# Altium PCB tetris.PcbDoc
Units mm, origin at the board's own origin, x right, y up, seen from the top; angles counter-clockwise.
Board outline 46.25 x 84.25 mm, 2 copper layers (Top Layer, Bottom Layer); 14 components, 11 nets, 45 pads, 0 vias.
Unrouted connection lines stored in the file: 8.
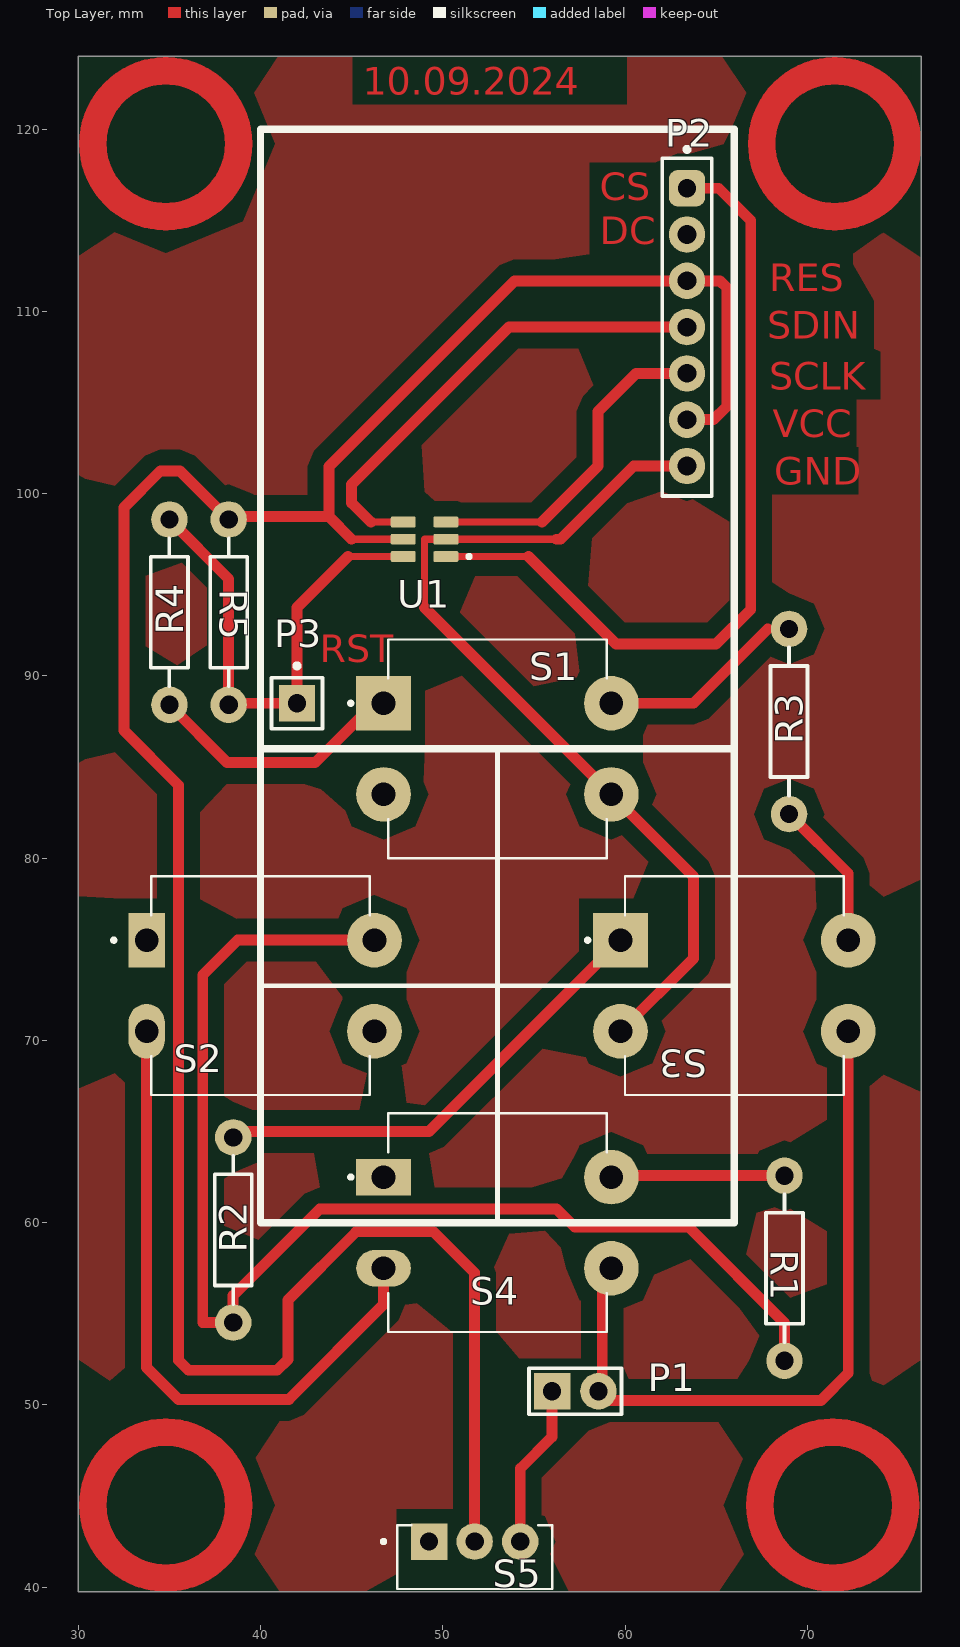
[diagram p0: Top Layer view]
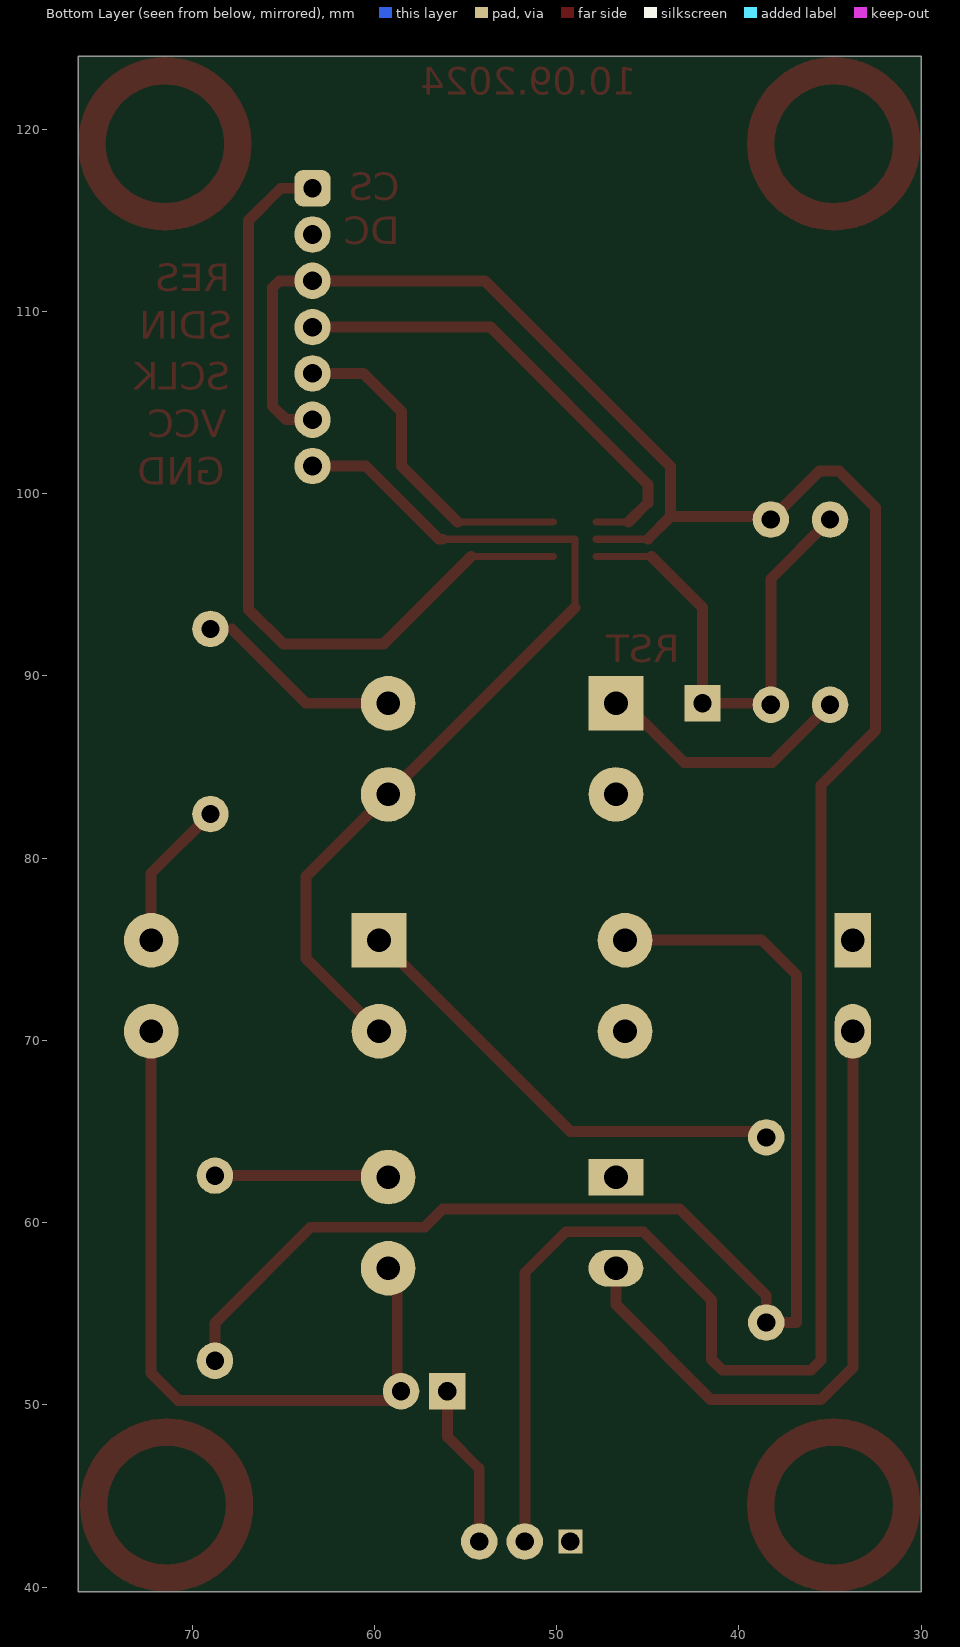
[diagram p1: Bottom Layer view, seen from below]

## Layer stack, top to bottom
Top Solder: solder mask 0.0102, Solder Resist, Dk 3.5
Top Layer: signal copper 0.0356
Dielectric 1: dielectric 0.32, FR-4, Dk 4.8
Bottom Layer: signal copper 0.0356
Bottom Solder: solder mask 0.0102, Solder Resist, Dk 3.5

## Board outline
30,39.75 76.25,39.75 76.25,124 30,124

## Design rules (kind name [scope] priority, off if disabled: settings)
Clearance [All] p1: gap=0.254 ignorepadtopadclearanceinfootprint=FALSE except(0: Arc-Hole Track-Hole SMDPad-Hole THPad-Hole Via-Hole Fill-Hole Poly-Hole Region-Hole Text-Hole; 0.8: Arc-Poly Track-Poly SMDPad-Poly THPad-Poly Via-Poly Fill-Poly Poly-Poly)
PolygonConnect [All] p1: connectstyle=Relief reliefconductorwidth=0.254 reliefentries=4 polygonreliefangle="90 Angle" airgapwidth=0.254
RoutingVias [All] p1: holewidth=0.711 width=1.27 viastyle="Through Hole" minholewidth=0.711 minwidth=1.27 maxholewidth=0.711 maxwidth=1.27
SolderMaskExpansion [All] p1: expansion=0.102
Width [All] p1: maxlimit=0.6 minlimit=0.254 preferedwidth=0.4
30 further rules are at their usual default settings.

## Components (designator, comment, footprint, x,y, rotation, side; value= is the part's Value field where it differs from the comment)
P1 "Power" HDR1X2 56,50.75 r0 top
P2 "LCD_SSD1306" 61300711821 63.4,109.14 r270 top
P3 "Reset" PIN1 42,88.5 r0 top
R1 "1K" AXIAL-0.4 68.75,57.5 r270 top
R2 "1K" AXIAL-0.4 38.5,59.6 r90 top
R3 "1K" AXIAL-0.4 69,87.5 r90 top
R4 "1K" AXIAL-0.4 35,93.5 r90 top
R5 "1K" AXIAL-0.4 38.25,93.5 r90 top
S1 "blue_up" SW_1571627-1#1 53,86 r0 top
S2 "black_left" SW_1571627-1#2 40,73 r0 top
S3 "red_right" SW_1571627-1#1 66,73 r0 top
S4 "white_down" SW_1571627-1#3 53,60 r0 top
S5 "Switch" SW_EG1270 51.75,42.5 r0 top
U1 "ATTINY10-TSHR" SOT95P280X145-6N 49,97.5 r180 top

## Footprints (in the part's own frame and the unit in brackets; to place one, negate y for a bottom-side part, rotate by r counter-clockwise, add the part's x,y. Pads: shape width x height; smd on the part's side, far side on the other; paste and mask are expansions set on the pad)
61300711821 [mm] "Socket Header, Pitch 2.54 mm, THT, Vertical, single row, 7p"
  rrect50% 2x2 hole 1: 1(-7.62,0)
  round 2 hole 1.02: 2(-5.08,0) 3(-2.54,0) 4(0,0) 5(2.54,0) 6(5.08,0) 7(7.62,0)
  silkscreen extent -9.87,-1.35 9.27,1.35, body extent -9.14,-1.25 9.14,1.25, height 8.55
AXIAL-0.4 [mm] "Axial Device, Thru-Hole; 2 Leads; 0.4 in Pin Spacing"
  round 2 hole 1: 1(-5.08,0) 2(5.08,0)
  silkscreen extent -4.06,-1.02 4.06,1.02
HDR1X2 [mm] "Connector; Header; 2 Position"
  rect 2x2 hole 1: 1(0,0)
  round 2 hole 1: 2(2.54,0)
  silkscreen extent -1.27,-1.27 3.81,1.27
PIN1 [mm] "Connector; Plug"
  rect 2x2 hole 1: 1(0,0)
  silkscreen extent -1.4,-1.4 1.4,2.17
SOT95P280X145-6N [mm]
  rrect25% 1.37x0.59 smd: 1(-1.17,0.95) 2(-1.17,0) 3(-1.17,-0.95) 4(1.17,-0.95) 5(1.17,0) 6(1.17,0.95)
  silkscreen extent -2.54,0.85 -2.34,1.05, body extent -1.4,-1.45 1.4,1.45, height 1.45
SW_1571627-1#1 [mm]
  rect 3x3 hole 1.3: 1(-6.25,2.5)
  round 3 hole 1.3: 2(6.25,2.5) 3(-6.25,-2.5) 4(6.25,-2.5)
  silkscreen extent -8.15,-6 6,6
SW_1571627-1#2 [mm]
  rect 2x3 hole 1.3: 1(-6.25,2.5)
  round 3 hole 1.3: 2(6.25,2.5) 4(6.25,-2.5)
  oval 2x3 hole 1.3: 3(-6.25,-2.5)
  silkscreen extent -8.15,-6 6,6
SW_1571627-1#3 [mm]
  rect 3x2 hole 1.3: 1(-6.25,2.5)
  round 3 hole 1.3: 2(6.25,2.5) 4(6.25,-2.5)
  oval 3x2 hole 1.3: 3(-6.25,-2.5)
  silkscreen extent -8.15,-6 6,6
SW_EG1270 [mm]
  rect 2x2 / inner round 1.308 / far side rect 1.308x1.308 hole 1: 1(-2.5,0)
  round 2 hole 1: 2(0,0) 3(2.5,0)
  silkscreen extent -5.1,-2.6 4.25,0.9, body extent -4.25,-4.6 4.25,0.9, height 5.1

## Part data
P1: library part "Header 2", "Header, 2-Pin", LatestRevisionDate=17-Jul-2002, LatestRevisionNote="Re-released for DXP Platform.", Publisher="Altium Limited"
P2: library part 61300711821, "WR-PHD Socket Header, THT, Vertical, pitch 2.54mm, 1 Row, 7P", Contact Resistance=20mOhm, Manufacturer="Wurth Elektronik", Operating Temperature Max=125°C, Operating Temperature Min=-40°C, Rated Current=3A, Withstanding Voltage=500V, Working Voltage=250V, Category="Board-to-Board Connectors", ComponentLink1Description="Website Link", ComponentLink1URL=https://www.we-online.com/redexpert/article/61300711821?ad, ComponentLink2Description="Datasheet Link", ComponentLink2URL=https://www.we-online.com/redexpert/spec/61300711821?ad, Gender="Socket Header", Manufacturer Part Number=61300711821, Match Code=WR-PHD, Mount="Through Hole", Number of Pins=7, Number of Rows=1, Orientation=Vertical, Packaging=Tray, Pitch=2.54mm
P3: library part Plug, "Plug", LatestRevisionDate=17-Jul-2002, LatestRevisionNote="Re-released for DXP Platform.", Publisher="Altium Limited"
R1 R2 R3 R4 R5: library part Res2, "Resistor", LatestRevisionDate=17-Jul-2002, LatestRevisionNote="Re-released for DXP Platform.", PackageDescription="Axial Device, Thru-Hole; 2 Leads; 0.4 in Pin Spacing", PackageReference=AXIAL-0.4, Published=8-Jun-2000, Publisher="Altium Limited"
S1 S2 S3 S4: library part FSM103A, "Switch Tactile OFF (ON) SPST Extended Square Button PC Pins 0.05A 12VDC 2.55N Thru-Hole Loose Piece", Package=None, Availability="In Stock", Check_prices=https://www.snapeda.com/parts/FSM103A/TE%20Connectivity%20ALCOSWITCH%20Switches/view-part/577644/?ref=eda, MF="TE Connectivity", MP=FSM103A, Price=None, Purchase-URL=https://pricing.snapeda.com/search/part/FSM103A/?ref=eda, SnapEDA_Link=https://www.snapeda.com/parts/FSM103A/TE%20Connectivity%20ALCOSWITCH%20Switches/view-part/577644/?ref=snap
S5: library part EG1270, "Slide Switch SPDT Through Hole, Right Angle", Package=None, Availability="In Stock", Check_prices=https://www.snapeda.com/parts/EG1270/E-Switch/view-part/?ref=eda, MF=E-Switch, MP=EG1270, Price=None, Purchase-URL=https://pricing.snapeda.com/search/part/EG1270/?ref=eda, SnapEDA_Link=https://www.snapeda.com/parts/EG1270/E-Switch/view-part/?ref=snap
U1: "AVR AVR® ATtiny Microcontroller IC 8-Bit 12MHz 1KB (512 x 16) FLASH SOT-23-6", Package="SOT-23-6 Microchip", Check_prices=https://www.snapeda.com/parts/ATTINY10-TSHR/Microchip/view-part/?ref=eda, MF=Microchip, MP=ATTINY10-TSHR, SnapEDA_Link=https://www.snapeda.com/parts/ATTINY10-TSHR/Microchip/view-part/?ref=snap

## Nets (pads, with @x,y where several pads share a name; then routed paths per layer and width w, separated by ;. In a path a pad name is that pad's centre, name@x,y a point inside that pad or via, vN(x,y) a via of type N, cw(c..) or ccw(c..) an arc to the next point about the centre after c; other vN are vias at no path point)
BTN_ADC: P3.1 R4.2 R5.1 U1.6 | length 27.5
  Top Layer w0.4: R5.1 R5.1@38.33,88.5 ; 44.8,96.55 U1.6
  Top Layer w0.6: R4.2 38.25,95.33 R5.1 ; R5.1@38.33,88.5 P3.1 42,93.75 44.8,96.55
GND: P1.2 P2.7 S1.3 S1.4 S2.3 S2.4 S3.3 S3.4 S4.3 S4.4 U1.2 | length 127.5
  Top Layer w0.4: 49,93.75 49,97.5 U1.2 56.25,97.5 ; P1.2 P1.2@58.75,50.96
  Top Layer w0.6: S2.3 33.75,52.05 35.5,50.3 41.55,50.3 46.75,55.5 S4.3 ; 49,93.75 S1.4 63.75,79 63.75,74.5 S3.3 ; 56.25,97.5 56.458,97.5 60.478,101.52 P2.7 ; P1.2 59.04,50.25 70.75,50.25 72.25,51.75 S3.4 ; P1.2@58.75,50.96 58.75,57 S4.4
LCD_CS: P2.1 U1.1 | length 45.1
  Top Layer w0.4: U1.1 54.7,96.55
  Top Layer w0.6: 54.7,96.55 59.5,91.75 65,91.75 66.9,93.65 66.9,115 65.14,116.76 P2.1
LCD_SCLK: P2.5 U1.3 | length 18.4
  Top Layer w0.4: U1.3 55.45,98.45
  Top Layer w0.6: 55.45,98.45 58.51,101.51 58.51,104.51 60.6,106.6 P2.5
LCD_SDIN: P2.4 U1.4 | length 26.2
  Top Layer w0.4: 46.05,98.45 U1.4
  Top Layer w0.6: 46.05,98.45 45,99.5 45,100.5 53.64,109.14 P2.4
NetP1_1: P1.1 S5.3 | length 9
  Top Layer w0.6: S5.3 54.25,46.5 56,48.25 P1.1
NetR1_1: R1.1 S4.1 S4.2 | length 9.7
  Top Layer w0.4: S4.1@46.58,62.5 S4.1 ; S4.2 S4.2@59.33,62.58
  Top Layer w0.6: S4.2@59.33,62.58 R1.1
NetR1_2: R1.2 R2.1 S2.1 S2.2 | length 69.3
  Top Layer w0.6: S2.2 38.75,75.5 36.83,73.58 36.83,54.52 R2.1 38.5,56 43.25,60.75 56.25,60.75 57.25,59.75 63.5,59.75 68.75,54.5 R1.2
NetR2_2: R2.2 R3.1 S3.1 S3.2 | length 34.6
  Top Layer w0.6: R2.2 38.5,64.25 39.25,65 49.25,65 S3.1 ; R3.1 72.25,79.17 S3.2
NetR3_2: R3.2 R4.1 S1.1 S1.2 | length 26.1
  Top Layer w0.4: S1.1@46.25,88.5 S1.1 ; S1.2 S1.2@59.25,88.75 ; 67.83,92.58 R3.2
  Top Layer w0.6: R4.1 38.17,85.25 43,85.25 S1.1@46.25,88.5 ; S1.2 63.75,88.5 67.83,92.58
VCC: P2.3 P2.6 R5.2 S5.2 U1.5 | length 141.1
  Top Layer w0.4: R5.2 R5.2@38.42,98.75 ; 45,97.5 U1.5
  Top Layer w0.6: R5.2 35.58,101.25 34.5,101.25 32.5,99.25 32.5,87 35.5,84 35.5,52.45 36.05,51.9 40.9,51.9 41.5,52.5 41.5,55.75 45.25,59.5 49.5,59.5 51.75,57.25 S5.2 ; R5.2@38.42,98.75 43.75,98.75 ; 45,97.5 43.75,98.75 ; P2.6 64.86,104.06 65.6,104.8 65.6,111.3 65.22,111.68 P2.3 53.93,111.68 43.75,101.5 43.75,98.75
pads on no net: P2.2 S5.1
copper on no net: | length 100.5
  Top Layer w1.5: 38.8,44.5 ccw(c34.8,44.5) 38.8,44.5 ; 38.8,119.2 ccw(c34.8,119.2) 38.8,119.2 ; 75.4,44.5 ccw(c71.4,44.5) 75.4,44.5 ; 75.5,119.2 ccw(c71.5,119.2) 75.5,119.2

## Polygon pours and split planes (outlines as drawn)
no net on Top Layer "Top Layer-No Net" (solid, pour order 0): 30,124 76.2,124 76.2,39.6 76,39.8 30,39.8

## Other copper
Top Layer:
  text "10.09.2024" at 45.6,121.9 h1.52
  text "CS" at 58.6,116.1 h1.52
  text "DC" at 58.6,113.7 h1.52
  text "RES" at 67.9,111.1 h1.52
  text "SDIN" at 67.8,108.5 h1.52
  text "SCLK" at 67.9,105.7 h1.52
  text "VCC" at 68.1,103.1 h1.52
  text "GND" at 68.2,100.5 h1.52
  text "RST" at 43.25,90.75 h1.52

## Silkscreen, mask and mechanical layers (free items; w line width, h text height)
Top Overlay:
  lines w0.254: 40,73 66,73 ; 53,60 53,86
  lines w0.4: 40,86 66,86 ; 40,86 40,60 66,60 66,86 ; 40,86 40,120 66,120 66,86